# Altium PCB IndAlarmIf1.PcbDoc
Units mil, origin at the board's own origin, x right, y up, seen from the top; angles counter-clockwise.
Board outline 6000 x 4000 mil, 2 copper layers (Top Layer, Bottom Layer); 78 components, 78 nets, 329 pads, 89 vias.
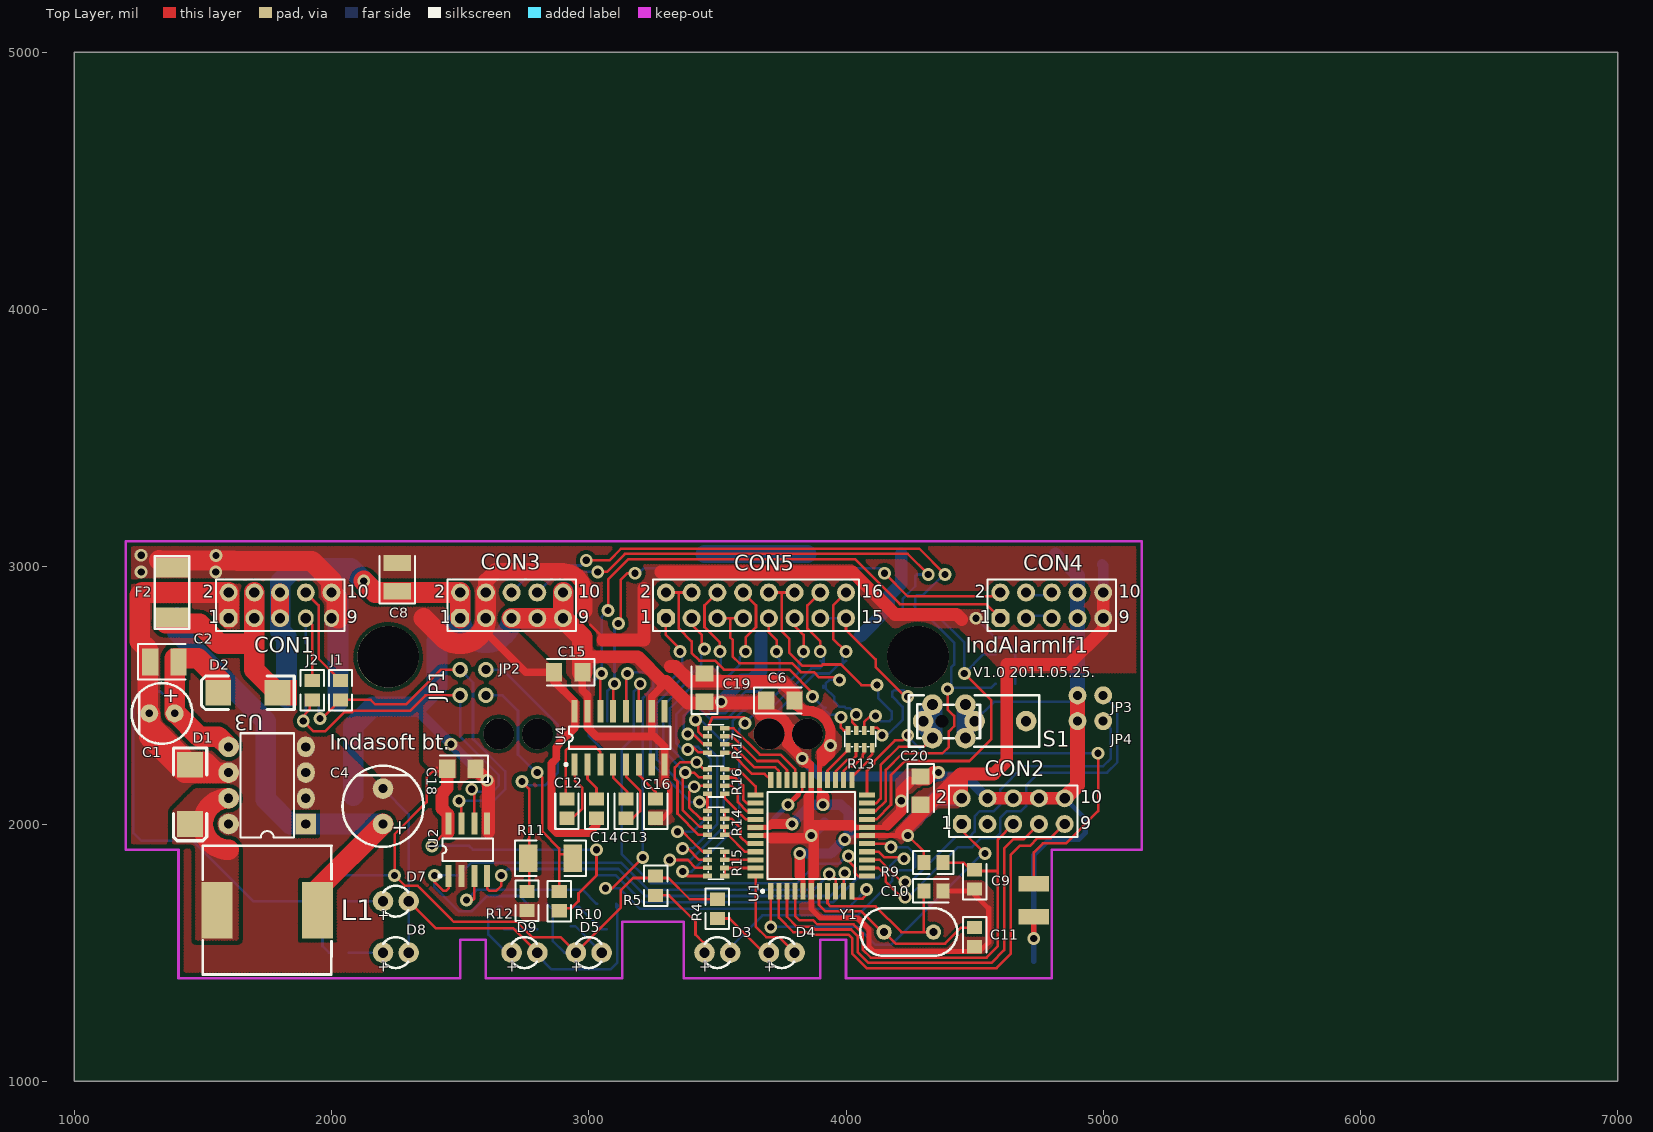
[diagram p0: Top Layer view]
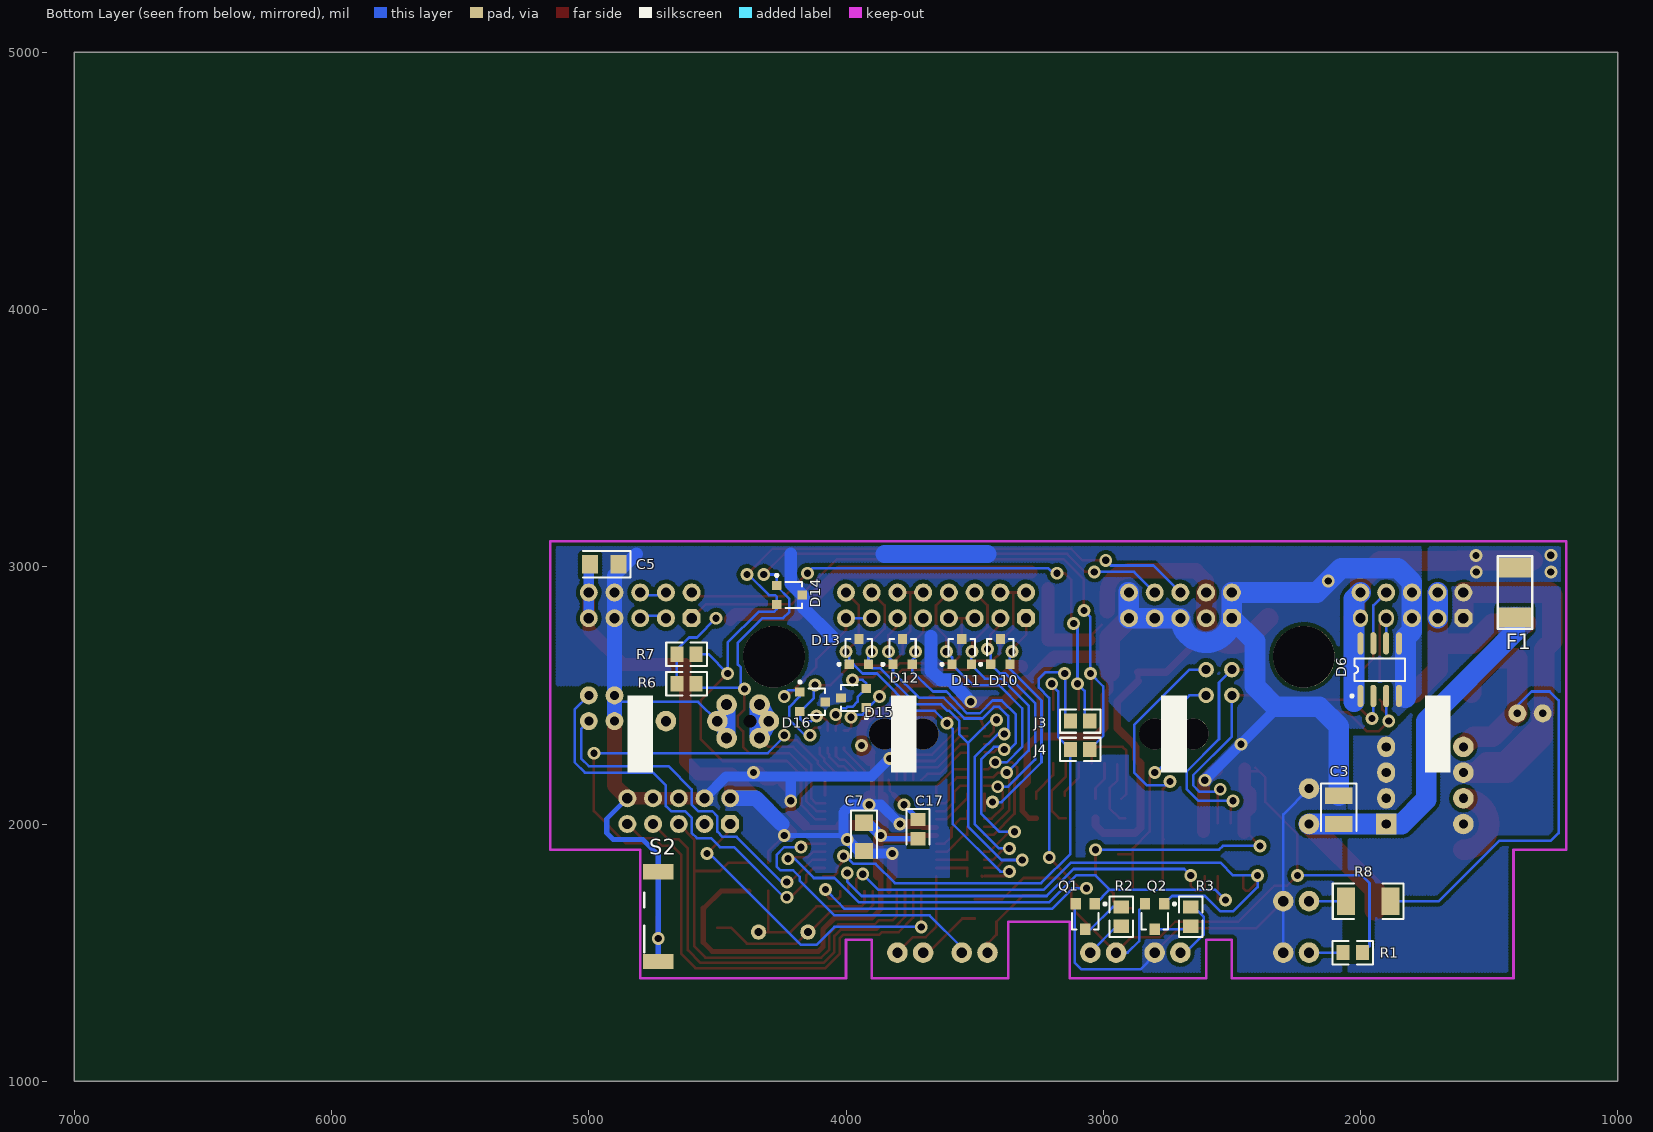
[diagram p1: Bottom Layer view, seen from below]

## Layer stack, top to bottom
Top Layer: signal copper 1.4
Dielectric: dielectric 12.6, FR-4, Dk 4.8
Bottom Layer: signal copper 1.4

## Board outline
1000,1000 7000,1000 7000,5000 1000,5000

## Design rules (kind name [scope] priority, off if disabled: settings)
Clearance poligon [All] p1 off: gap=15
Clearance [All] p2: gap=10
ComponentClearance [All] p1: gap=0 collisioncheckmode=1
PolygonConnect [All] p1: connectstyle=Direct reliefconductorwidth=10 reliefentries=4 polygonreliefangle="90 Angle"
RoutingLayers [All] p1: top layer=Horizontal bottom layer=Vertical
RoutingVias [All] p1: holewidth=28 width=50 viastyle="Through Hole" minholewidth=28 minwidth=50 maxholewidth=28 maxwidth=50
SolderMaskExpansion [All] p1: expansion=4
TestPointUsage [All] p1: valid=0 allowmultiple=FALSE
Testpoint [All] p1: side=15 testpointundercomponent=TRUE minsize=40 maxsize=100 preferedsize=60 minholesize=0 maxholesize=40 preferedholesize=32 testpointgrid=1 style=1023 order=1234567890
Width POWER [InNetClass('Powe Nets')] p1: maxlimit=80 minlimit=10 preferedwidth=20 toplayer_prefwidth=10 bottomlayer_prefwidth=10 minimp=50.000000 maximp=50.000000 favimp=50.000000
Width [All] p2: maxlimit=20 minlimit=10 preferedwidth=10
16 further rules are at their usual default settings.

## Classes and differential pairs
net class "Powe Nets": GND NetC3_2 NetD1_2 U+ UIN VCC

## Components (designator, comment, footprint, x,y, rotation, side; value= is the part's Value field where it differs from the comment)
C1 "Cap Pol1" C6X11RM2.5 1390,2430 r180 top
C2 "Cap Semi" CC3225-1210 1350,2630 r0 top
C3 "Cap Semi" CC3225-1210 2085,2055 r270 bottom
C4 "Cap Pol1" C8X11RM3.5 2200,2000 r90 top
C5 "Cap Semi" CC3216-1206 4940,3010 r0 bottom
C6 "Cap Semi" CC3216-1206 3745,2480 r0 top
C7 "Cap Semi" CC3216-1206 3930,1950 r270 bottom
C8 "Cap Semi" CC3225-1210 2255,2960 r90 top
C9 "Cap Semi" CC2012-0805 4500,1785 r90 top
C10 "Cap Semi" CC2012-0805 4340,1740 r0 top
C11 "Cap Semi" CC2012-0805 4500,1560 r270 top
C12 "Cap Semi" CC2012-0805 2915,2060 r90 top
C13 "Cap Semi" CC2012-0805 3145,2060 r90 top
C14 "Cap Semi" CC2012-0805 3030,2060 r90 top
C15 "Cap Semi" CC3216-1206 2920,2590 r180 top
C16 "Cap Semi" CC2012-0805 3260,2060 r90 top
C17 "Cap Semi" CC2012-0805 3720,1980 r270 bottom
C18 "Cap Semi" CC3216-1206 2505,2215 r180 top
C19 "Cap Semi" CC3216-1206 3450,2530 r90 top
C20 "Cap Semi" CC3216-1206 4290,2130 r270 top
CON1 "RS485" HDR2X5#1 1600,2800 r0 top
CON2 "ISP" HDR2X5#2 4450,2000 r0 top
CON3 "IIC" HDR2X5#2 2500,2800 r0 top
CON4 "RS232" HDR2X5#2 4600,2800 r0 top
CON5 "EXT" HDR2X8 3300,2800 r0 top
D1 "LL5819" MELF 1450,2000 r270 top
D2 "LL5819" MELF 1560,2510 r180 top
D3 "L-13ID" LED3MM 3450,1500 r0 top
D4 "L-13GD" LED3MM 3700,1500 r0 top
D5 "L-13ID" LED3MM 2950,1500 r0 top
D6 "USB6B1" NSO8#1 1925,2600 r180 bottom
D7 "L-13YD" LED3MM 2200,1700 r0 top
D8 "L-13YD" LED3MM 2200,1500 r0 top
D9 "L-13GD" LED3MM 2700,1500 r0 top
D10 "ESDA6V1L" SO-G3/C2.5#1 3400,2670 r180 bottom
D11 "ESDA6V1L" SO-G3/C2.5#1 3550,2670 r180 bottom
D12 "ESDA6V1L" SO-G3/C2.5#1 3780,2670 r180 bottom
D13 "ESDA6V1L" SO-G3/C2.5#1 3950,2670 r180 bottom
D14 "ESDA6V1L" SO-G3/C2.5#1 4220,2890 r270 bottom
D15 "ESDA6V1L" SO-G3/C2.5#1 3970,2490 r90 bottom
D16 "ESDA6V1L" SO-G3/C2.5#1 4130,2475 r270 bottom
F1 "500mA" minifuse 1400,2900 r270 bottom
F2 "500mA" minifuse 1380,2900 r90 top
J1 "" CR2012-0805 2035,2520 r270 top
J2 "" CR2012-0805 1925,2520 r270 top
J3 "Res Semi" CR2012-0805 3090,2400 r0 bottom
J4 "Res Semi" CR2012-0805 3090,2290 r0 bottom
JP1 "Jumper" JP#1 2600,2500 r180 top
JP2 "Jumper" JP#1 2500,2600 r0 top
JP3 "Jumper" JP#2 4900,2500 r0 top
JP4 "Jumper" JP#2 4900,2400 r0 top
L1 "Inductor" NPIS27H 1700,1715 r0 top
Q1 "MMUN2211" SO-G3/C2.5#2 3070,1640 r0 bottom
Q2 "MMUN2111" SO-G3/C2.5#2 2800,1640 r0 bottom
R1 "Res Semi" CR2012-0805 2030,1500 r180 bottom
R2 "Res Semi" CR2012-0805 2930,1640 r270 bottom
R3 "Res Semi" CR2012-0805 2660,1640 r270 bottom
R4 "Res Semi" CR2012-0805 3500,1670 r90 top
R5 "Res Semi" CR2012-0805 3260,1760 r90 top
R6 "Res Semi" CR2012-0805 4620,2545 r0 bottom
R7 "Res Semi" CR2012-0805 4620,2660 r0 bottom
R8 "Res Semi" CR5025-2010 1970,1700 r180 bottom
R9 "Res Semi" CR2012-0805 4340,1850 r0 top
R10 "Res Semi" CR2012-0805 2885,1700 r90 top
R11 "Res Semi" CR5025-2010 2851.53,1867.24 r0 top
R12 "Res Semi" CR2012-0805 2760,1700.75 r90 top
R13 "4x22" YC164 4055,2330 r180 top
R14 "4x270" YC164 3495,2005 r270 top
R15 "4x270" YC164 3495,1845 r270 top
R16 "4x470" YC164 3495,2165 r90 top
R17 "4x470" YC164 3495,2325 r90 top
S1 "SW-PB" SPPB512300+MINICW 4336,2334 r0 top
S2 "SW-PB" SPPB6A0400-R 4730,1640 r180 bottom
U1 "AtMega..4" 44A 3865,1955 r90 top
U2 "MAX1487CSA" NSO8#2 2530,1900 r0 top
U3 "LM2574N-5" 626-05 1750,2150 r90 top
U4 "DS232AR-N" SOIC16N 3120,2335 r0 top
Y1 "XTAL" HC49 4340,1580 r180 top

## Footprints (in the part's own frame and the unit in brackets; to place one, negate y for a bottom-side part, rotate by r counter-clockwise, add the part's x,y. Pads: shape width x height; smd on the part's side, far side on the other; paste and mask are expansions set on the pad)
44A [mm] "QFP; 44 Leads; Body 10 x 10 mm; Pitch 0.8 mm"
  rect 1.6x0.5 smd: 1(-5.5,4) 2(-5.5,3.2) 3(-5.5,2.4) 4(-5.5,1.6) 5(-5.5,0.8) 6(-5.5,0) 7(-5.5,-0.8) 8(-5.5,-1.6) 9(-5.5,-2.4) 10(-5.5,-3.2) 11(-5.5,-4) 23(5.5,-4) 24(5.5,-3.2) 25(5.5,-2.4) 26(5.5,-1.6) 27(5.5,-0.8) 28(5.5,0) 29(5.5,0.8) 30(5.5,1.6) 31(5.5,2.4) 32(5.5,3.2) 33(5.5,4)
  rect 0.5x1.6 smd: 12(-4,-5.5) 13(-3.2,-5.5) 14(-2.4,-5.5) 15(-1.6,-5.5) 16(-0.8,-5.5) 17(0,-5.5) 18(0.8,-5.5) 19(1.6,-5.5) 20(2.4,-5.5) 21(3.2,-5.5) 22(4,-5.5) 34(4,5.5) 35(3.2,5.5) 36(2.4,5.5) 37(1.6,5.5) 38(0.8,5.5) 39(0,5.5) 40(-0.8,5.5) 41(-1.6,5.5) 42(-2.4,5.5) 43(-3.2,5.5) 44(-4,5.5)
  silkscreen extent -5.62,-4.3 4.3,4.92
626-05 [mil] "DIP; 8 Leads; Row Spacing 7.62 mm; Pitch 2.54 mm"
  rect 80x80 hole 35.43: 1(-150,-150)
  oval 80x70 hole 35.43: 2(-50,-150) 3(50,-150) 4(150,-150)
  round 80 hole 35.43: 5(150,150) 6(50,150) 7(-50,150) 8(-150,150)
  silkscreen extent -203,-104 203,104
C6X11RM2.5 [mil]
  round 70 hole 30: 1(0,0) 2(98.42,0)
  silkscreen extent -69,-118 167,118
C8X11RM3.5 [mil]
  round 80 hole 35: 1(0,0) 2(137.8,0)
  silkscreen extent -89,-157 226,157
CC2012-0805 [mm]
  rect 1.3x1.5 smd: 1(-0.95,0) 2(0.95,0)
  silkscreen extent -2,-1.15 1.5,1.15
CC3216-1206 [mm]
  rect 1.6x1.8 smd: 1(-1.4,0) 2(1.4,0)
  silkscreen extent -2.6,-1.3 2.1,1.3
CC3225-1210 [mm]
  rect 1.6x2.7 smd: 1(-1.4,0) 2(1.4,0)
  silkscreen extent -2.6,-1.75 2.1,1.75
CR2012-0805 [mm]
  rect 1.3x1.5 smd: 1(-0.95,0) 2(0.95,0)
  silkscreen extent -2,-1.15 2,1.15
CR5025-2010 [mm]
  rect 1.8x2.7 smd: 1(-2.2,0) 2(2.2,0)
  silkscreen extent -3.5,-1.75 3.5,1.75
HC49 [mil]
  round 60 hole 30: 1(0,0) 2(192.13,0)
  silkscreen extent -93,-93 285,93
HDR2X5#1 [mil] "Connector; Header; 5x2 Position"
  oct 70x70 hole 40: 1(0,0)
  round 70 hole 40: 2(0,100) 3(100,0) 4(100,100) 5(200,0) 6(200,100) 8(300,100) 10(400,100)
  oval 60x70 hole 40: 7(300,0) 9(400,0)
  silkscreen extent -50,-50 450,150
HDR2X5#2 [mil] "Connector; Header; 5x2 Position"
  oct 70x70 hole 40: 1(0,0)
  round 70 hole 40: 2(0,100) 3(100,0) 4(100,100) 5(200,0) 6(200,100) 7(300,0) 8(300,100) 9(400,0) 10(400,100)
  silkscreen extent -50,-50 450,150
HDR2X8 [mil] "Connector; Header; 8x2 Position"
  oct 70x70 hole 40: 1(0,0)
  round 70 hole 40: 2(0,100) 3(100,0) 4(100,100) 5(200,0) 6(200,100) 7(300,0) 8(300,100) 9(400,0) 10(400,100) 11(500,0) 12(500,100) 13(600,0) 14(600,100) 15(700,0) 16(700,100)
  silkscreen extent -50,-50 750,150
JP#1 [mil]
  round 60 hole 35: 1(0,0) 2(100,0)
JP#2 [mil]
  round 70 hole 35: 1(0,0) 2(100,0)
LED3MM [mil]
  round 80 hole 40: 1(0,0) 2(100,0)
  silkscreen extent 1,-60 99,60
MELF [mil]
  rect 100x100 smd: 1(-230,0) 2(0,0)
  silkscreen extent -295,-65 65,65
minifuse [mil]
  rect 77x124 smd: 1(-96.5,0) 2(96.5,0)
  silkscreen extent -141,-67 141,68
NPIS27H [mil] "NPIS27H SMD induktivitás"
  rect 120x220 smd: 1(-145,-50) 2(245,-50)
  silkscreen extent -200,-300 300,200
NSO8#1 [mm] "Small Outline; 8 Leads; Body Width 3.9 mm; Pitch 1.27 mm"
  oval 0.6x2.2 smd: 1(-1.905,-2.6) 2(-0.635,-2.6) 3(0.635,-2.6) 4(1.905,-2.6) 5(1.905,2.6) 6(0.635,2.6) 7(-0.635,2.6) 8(-1.905,2.6)
  silkscreen extent -2.88,-2.72 2.5,1.1
NSO8#2 [mm] "Small Outline; 8 Leads; Body Width 3.9 mm; Pitch 1.27 mm"
  rect 0.6x2.2 smd: 1(-1.905,-2.6) 2(-0.635,-2.6) 3(0.635,-2.6) 4(1.905,-2.6) 5(1.905,2.6) 6(0.635,2.6) 7(-0.635,2.6) 8(-1.905,2.6)
  silkscreen extent -2.88,-2.72 2.5,1.1
SO-G3/C2.5#1 [mm]
  rect 0.9x0.95 smd: 1(-0.95,-1.25) 2(0.95,-1.25) 3(0,1.25)
  silkscreen extent -2.08,-1.37 1.3,1.25
SO-G3/C2.5#2 [mm]
  rect 1.016x1.143 smd: 1(-0.95,-1.25) 2(0.95,-1.25) 3(0,1.25)
  silkscreen extent -2.07,-1.37 1.3,1.25
SOIC16N [mm] "Small Outline; 16 Leads; Body Width 3.9 mm; Pitch 1.27 mm"
  rect 0.6x2.2 smd: 1(-4.445,-2.625) 2(-3.175,-2.625) 3(-1.905,-2.625) 4(-0.635,-2.625) 5(0.635,-2.625) 6(1.905,-2.625) 7(3.175,-2.625) 8(4.445,-2.625) 9(4.445,2.625) 10(3.175,2.625) 11(1.905,2.625) 12(0.635,2.625) 13(-0.635,2.625) 14(-1.905,2.625) 15(-3.175,2.625) 16(-4.445,2.625)
  silkscreen extent -5.42,-2.75 5,1.13
SPPB6A0400-R [mil] "SPPB6A0400 SWITCH A NYÁK ÉLÉN"
  rect 120x60 smd far side: 1(0,0) 2(0,127.95)
  rect 120x60 smd: 3(0,-174.41) 3(0,174.41)
  silkscreen extent -54,-138 -54,92
SPPB512300+MINICW [mil]
  round 0 hole 49.21: 0(37.4,64.96)
  round 80 hole 40: 1(-36,66) 2(164,66) 3(364,66)
  round 80 hole 43.31: 1(0,0) 1(0,129.92) 2(127.95,0) 2(127.95,129.92)
  silkscreen extent -91,-34 415,166
YC164 [mm] "YC164 Chip Resistor array"
  rect 0.45x0.9 smd: 1(-1.2,-0.85) 2(-0.4,-0.85) 3(0.4,-0.85) 4(1.2,-0.85) 5(1.2,0.85) 6(0.406,0.838) 7(-0.4,0.85) 8(-1.2,0.85)
  silkscreen extent -1.52,-0.76 1.52,0.76

## Part data
C1 C4: "Polarized Capacitor (Radial)"
C2 C3 C5 C6 C7 C8 C9 C10 C11 C12 C13 C14 C15 C16 C17 C18 C19 C20: "Capacitor (Semiconductor SIM Model)"
CON1 CON3 CON4: library part "Header 5X2", "Header, 5-Pin, Dual row"
CON2: library part "HEADER 5X2"
CON5: library part "Header 8X2", "Header, 8-Pin, Dual row"
D1 D2: library part "D Schottky", "Schottky Diode"
D3 D4 D5 D7 D8 D9: library part LED3, "Typical BLUE SiC LED"
D10 D11 D12 D13 D14 D15 D16: "DUAL TRANSIL ARRAY / FOR ESD PROTECTION"
F1 F2: library part "Fuse 1", "Fuse"
J1 J2: library part "Res Semi", "Semiconductor Resistor"
J3 J4 R1 R2 R3 R4 R5 R6 R7 R8 R9 R10 R11 R12: "Semiconductor Resistor"
JP1 JP2 JP3 JP4: "Jumper Wire"
Q1: library part NPNR1, "NPN Transistor"
Q2: library part PNPR1, "NPN Transistor"
R13 R14 R15 R16 R17: library part RES4
S1 S2: "Switch"
U1: library part ATMEGA164PA-AU
U2: "Low-Power, Slew-Rate-Limited RS-485/RS-422 Transceiver"
U3: "Easy Switcher 0.5A Step-Down Voltage Regulator"
U4: "Dual RS-232 Transmitter/Receiver"
Y1: "Crystal Oscillator"

## Free pads (board coordinates)
  round 240 hole 240: 1(2220,2650) 1(4280,2650)
  round 120 hole 120: 2(2650,2350) 2(2800,2350) 2(3700,2350) 2(3850,2350)

## Via types
v1: diameter 50, hole 28, Top Layer to Bottom Layer, 89 vias

## Nets (pads, with @x,y where several pads share a name; then routed paths per layer and width w, separated by ;. In a path a pad name is that pad's centre, name@x,y a point inside that pad or via, vN(x,y) a via of type N, cw(c..) or ccw(c..) an arc to the next point about the centre after c; other vN are vias at no path point)
AN0: CON5.1 D10.2 R14.1 R16.8 | length 988
  Top Layer w10: CON5.1 3300,2735 3355,2680 v1(3355,2670) ; v1(3430,2085) 3461.54,2085 ; R14.1 R16.8
  Bottom Layer w10: v1(3355,2670) 3362.6,2662.4 D10.2 3362.6,2602.6 3240,2480 3240,2240 3395,2085 v1(3430,2085)
AN1: CON5.3 D10.1 R14.2 R16.7 | length 1046.7
  Top Layer w10: CON5.3@3400,2775 3440,2735 v1@3440,2670 ; R14.2 3444.25,2020.75 3434.25,2020.75 3390,2065 3390,2105 3390,2125 3414.25,2149.25 3444.25,2149.25 R16.7
  Bottom Layer w10: v1(3410,2145) 3370,2145 3265,2250 3265,2470 3380,2585 3401.61,2585 D10.1 3437.4,2667.4 v1@3440,2670
  other v1: 3450,2680
AN2: CON5.6 D11.2 R14.3 R16.6 | length 1286.1
  Top Layer w10: R14.3 3430.75,1989.25 3365,2055 3365,2190 v1(3375,2200) 3410,2200 3429,2181 R16.6 ; CON5.6 3450,2850 3450,2765 3510,2705 v1(3510,2670)
  Bottom Layer w10: v1(3375,2200) 3290,2285 3290,2460 3395,2565 3460,2565 3512.6,2617.6 D11.2 3512.6,2652.4 v1@3495,2670
AN3: CON5.8 D11.1 R14.4 R16.5 | length 1429.9
  Top Layer w10: R14.4 3427.24,1957.76 3345,2040 3345,2165 3335,2175 3335,2220 3355,2240 v1(3420,2240) 3447.76,2212.24 R16.5 ; CON5.8 3650,2850 3650,2765 3610,2725 v1(3610,2670)
  Bottom Layer w10: v1(3420,2240) 3390,2240 3375,2240 3315,2300 3315,2315 3315,2450 3405,2540 3506.61,2540 D11.1 3587.4,2647.4 v1(3610,2670)
AN4: CON5.9 D12.2 R15.1 R17.8 | length 1645.3
  Top Layer w10: v1(3345,1970) 3365,1970 3402.24,1932.76 3442.76,1892.24 R15.1 ; v1@3375,2300 3405,2300 3425.36,2279.64 R17.8@3459.65,2279.64 ; R15.1@3461.54,1893.46 R15.1 ; CON5.9 3700,2745 3730,2715 v1@3730,2650 ; R15.1 3457.76,1892.24 R15.1
  Bottom Layer w10: v1(3345,1970) 3405,1970 3425,1990 3475,2040 3475,2250 3425,2300 3395,2300 v1@3375,2300 ; v1(3385,2290) 3365,2290 3340,2315 3340,2335 3340,2425 3395,2480 3430,2480 3480,2430 3530,2430 3610,2515 3661.81,2515 3742.6,2590.79 3742.6,2637.4 v1@3730,2650
  other v1: 3730,2670
AN5: CON5.11 D12.1 R15.2 R17.7 | length 1635.2
  Top Layer w10: v1(3365,1905) 3385,1905 3429.25,1860.75 R15.2 ; v1@3385,2360 3395,2360 3445.75,2309.25 R17.7 ; CON5.11@3800,2770 3835,2735 v1@3835,2650
  Bottom Layer w10: v1(3365,1905) 3404.64,1905 3500,2000.36 3500,2025 3500,2260 3400,2360 v1@3385,2360 ; v1(3385,2350) 3370,2365 3370,2420 3385,2435 3405,2455 3425,2455 3470,2410 3540,2410 3575,2445 3620,2490 3715,2490 3817.4,2590.79 3817.4,2632.4 v1@3835,2650
  other v1: 3835,2670
AN6: CON5.14 D13.2 R15.3 R17.6 | length 1859.8
  Top Layer w10: v1(3315,1860) 3385,1860 3415.75,1829.25 R15.3 ; v1@3425,2415 3425,2360 3444,2341 R17.6 ; v1(3900,2670) 3900,2710 3850,2760 3850,2850 CON5.14
  Bottom Layer w10: v1(3315,1860) 3395,1860 3525,1990 3525,2015 3525,2315 ; v1@3425,2415 3525,2315 ; D13.2@3900,2635 D13.2@3912.6,2622.4 ; v1@3912.6,2657.4 D13.2 3896.81,2605 3865,2605 3725,2465 3630,2465 3605,2440 3598.28,2440 3560,2401.72 3560,2395 3560,2350 3525,2315
  other v1: 3415,2405
AN7: CON5.16 D13.1 R15.4 R17.5 | length 1789.1
  Top Layer w10: v1(3365,1815) 3382.24,1797.76 R15.4 ; R15.4@3470,1795 R15.4@3472.76,1797.76 ; R17.5@3472.24,2372.24 R17.5@3462.24,2372.24 ; v1@3605,2415 3480,2415 R17.5@3462.24,2372.24 ; v1(4000,2670) 3950,2720 3950,2850 CON5.16 ; R17.5@3462.24,2372.24 R17.5 R17.5@3462.24,2372.24
  Bottom Layer w10: v1(3365,1815) 3400,1815 3585,2000 3585,2030 3585,2370 3630,2415 3655,2440 3735,2440 3880,2585 3935,2585 3970.79,2620.79 D13.1 v1@3987.4,2657.4 ; D13.1@3987.4,2622.4 D13.1@4000,2635
  other v1: 3606.91,2391.91
EA: CON1.7 D6.6 J2.1 | length 350.6
  Top Layer w10: CON1.7 1925,2775 J2.1
  Bottom Layer w10: D6.6 CON1.7
EB: CON1.8 D6.7 J1.1 | length 616.9
  Top Layer w10: CON1.8 1950,2850 1950,2642.4 J1.1
  Bottom Layer w10: CON1.8 1950,2850 D6.7
GND: C1.2 C2.1 C3.1 C4.2 C5.1 C6.1 C7.1 C8.1 C9.1 C10.2 C11.2 C15.1 C16.1 C17.2 C18.1 C19.1 C20.1 CON1.1 CON1.2 CON1.5 CON1.6 CON2.4 CON2.6 CON2.8 CON2.10 CON3.1 CON3.2 CON3.5 CON3.7 CON3.9 CON3.10 CON4.7 CON4.8 D1.1 D6.4 D6.5 D7.2 D8.2 D9.2 D10.3 D11.3 D12.3 D13.3 D14.3 D15.3 D16.3 JP3.1 JP4.1 pad.2@3700,2350 pad.2@3850,2350 Q1.2 R12.1 S1.2 S2.1 S2.3 U1.6 U1.18 U1.28 U1.39 U2.2 U2.5 U3.2 U3.3 U3.4 U3.6 U3.8 U4.8 U4.10 U4.15 | length 18552.9
  Top Layer w10: D7.2 2405,1595 2705,1595 D9.2 D9.2@2800,1505
  Top Layer w20: C16.1 3287.6,2022.6 3315,2050 3315,2145 3305,2155 ; U1.39 3700,1955 3710,1945 ; 3850,2235 3865,2220 ; 3855,2105 3865,2115 U1.28 3865,2220 ; U1.6 3865,1790 3875,1800 ; 3865,1770 3865,1670 3900,1635 4045,1635 4090,1590 4090,1521.92 4106.92,1505 4520,1505 4555,1540 4555,1672.4 4552.6,1672.4 4485,1740 C10.2 ; 3865,2235 3865,2220 ; 4020,1995 4028.5,1986.5 U1.18 4151.5,1986.5 4160,1995 ; v1(4730,1555) S2.1
  Top Layer w30: C15.1 2975.12,2519.88 2995,2500 U4.15@2995,2405 ; U4.15 2995,2375 3030,2340 3255,2340 3295,2300 3295,2165 3305,2155 ; 3245,2340 3245,2495 3245,2495.06 3302.3,2552.36
  Top Layer w40: C6.1@3666.17,2483.83 3666.17,2422.49 cw(c3700,2350) 3770.59,2312.35 ; 3710,1945 v1@3875,1945 ; 3775,2310 3850,2235 ; 3785,2300 3785,2370 ; v1@3855,1945 3855,2105 ; 3865,1995 4020,1995 ; 3875,1800 v1@3875,1945 ; v1@3875,1970 v1@3875,1945 ; 4160,1995 4215,2050 4215,2130 4250,2165
  Top Layer w50: C4.2 C4.2@2207.8,2137.8 ; C18.1@2560.12,2209.88 C18.1 2560.12,2214.88 2610,2165 U2.5@2610,1970 ; 2975.12,2650 3190,2650 3285,2555 3300,2555 3375,2480 3385,2470 C6.1@3695,2470 ; C20.1@4285,2175 4315,2175 4340,2200 v1(4360,2200) ; CON2.4 CON2.10
  Top Layer w60: CON2.10 4900,2150 JP3.1
  Top Layer w70: CON1.5 CON1.6
  Top Layer w80: D1.1@1439.19,2240.81 1509.19,2240.81 1550,2200 U3.6 1430,2200 1291.58,2338.43 C1.2 ; D1.1 1295,2385 1295,2426.57 C1.2 ; CON1.1 CON1.2 1265,2900 1255,2890 1255,2710 1285,2680 1285,2436.57 C1.2 ; v1(2125,2945) 2170,2900 CON3.2 CON3.1 ; CON3.5 CON3.9 ; CON3.10 CON3.9 ; C15.1 2975.12,2724.88 CON3.9
  Bottom Layer w10: 2110,2450 2105,2450 2105,2438.51 2115,2448.51 ; C4.2 2300,2037.8 D7.2 D8.2 ; D9.2 2800,1490 2855,1435 3085,1435 3110,1460 3110,1686.62 Q1.2 ; Q1.2@3107.4,1677.4 Q1.2 ; Q1.2@3115,1681.61 Q1.2 ; S1.2@4500,2400 4575,2475 JP3.1@4900,2475
  Bottom Layer w20: C17.2 3852.6,1942.6 v1(3865,1955) ; C7.1@3915.12,2005.12 C7.1 ; S2.3@4730,1465.59 4730,1880 4790,1940 4835,1940 4905,1940 4930,1965 4930,2020 CON2.10
  Bottom Layer w40: 2330.87,2455.87 2330.87,2444.13 v1(2465,2310) v1(2605,2170) ; v1(3830,2255) 3900,2185 4465,2185 CON2.4 ; v1(3865,1955) C7.1@3915.12,2005.12 ; v1(4215,2090) 4215,2185
  Bottom Layer w50: v1(3515,2475) 3595,2560 3630,2560 3670,2595 3670,2730 ; 4055,2730 4165,2840 4165,2885 4215,2935 4215,3049.21 ; 4815,3050 4900,2965
  Bottom Layer w60: JP4.1 4900,2965
  Bottom Layer w70: CON3.10 CON3.10@2905,2905 ; 3450,3049.21 3850,3049.21 ; S1.2@4463.95,2334 S1.2@4463.95,2463.92
  Bottom Layer w80: 1825,2490 1825,2725 1800,2750 CON1.6 1800,2940 1855,2995 2075,2995 2170,2900 CON3.2 CON3.1 2410,2710 2410,2535 2330.87,2455.87 2160.12,2455.87 2085,2380.76 C3.1 ; CON3.1@2500.12,2800.01 ccw(c2600,2805) CON3.5@2699.81,2798.76 ; CON3.5 CON3.7 CON3.9 CON3.10
IRD: CON4.2 J3.1 U4.13 | length 2224.6
  Top Layer w10: U4.13@3095,2443.35 3095,2540 v1(3100,2545) ; v1(3115,2780) 3125,2790 3125,2950 3150,2975 v1@3190,2975 ; v1(4150,2975) 4240,2885 4585,2885 CON4.2
  Bottom Layer w10: J3.1@3072.6,2400 3072.6,2517.6 v1(3100,2545) 3100,2765 v1@3115,2785 ; v1@3190,2975 3195,2975 3215,2995 3985,2995 4030,2995 4130,2995 v1(4150,2975)
  other v1: 3180,2975
ITX: CON4.1 J4.1 U4.14 | length 2510
  Top Layer w10: U4.14@3045,2443.35 3045,2580 v1(3050,2585) ; v1(3075,2830) 3075,2950 3155,3030 4000,3030 4035,3030 4210,2855 4545,2855 CON4.1
  Bottom Layer w10: J4.1 3000,2342.6 3000,2535 v1(3050,2585) 3050,2805 3055,2810 v1(3075,2830)
JP3: JP3.2 U1.13 | length 1617.6
  Top Layer w10: U1.13 4125.98,1829.02 4155,1800 4155,1775 4215,1715 v1(4230,1715)
  Bottom Layer w10: v1(4230,1715) 4240,1715 4435,1910 4490,1910 4525,1945 4580,1945 4600,1965 4600,2025 4625,2050 4680,2050 4700,2070 4700,2150 4750,2200 5015,2200 5055,2240 5055,2445 JP3.2
JP4: JP4.2 U1.14 | length 1410.4
  Top Layer w10: U1.14 4131.2,1860.51 4216.72,1775 v1(4230,1775)
  Bottom Layer w10: v1(4230,1775) 4250,1775 4425,1950 4480,1950 4500,1970 4500,2030 4520,2050 4575,2050 4600,2075 4600,2135 4690,2225 5000,2225 5030,2255 5030,2370 JP4.2
L1: D3.2 U1.16 | length 1130.7
  Top Layer w10: U1.16 4161.5,1923.5 v1(4175,1910)
  Bottom Layer w10: D3.2 3550,1520 3675,1645 4045,1645 4180,1780 4180,1795 4205,1820 4255,1820 4270,1835 4270,1880 4240,1910 v1(4175,1910)
L2: D4.2 U1.44 | length 389.6
  Top Layer w10: U1.44 3648.46,1601.54 3690,1560 3740,1560 D4.2
MISO: CON2.9 U1.2 | length 1787.3
  Top Layer w10: U1.2 3739.02,1700.98 3739.02,1635.98 3795,1580 3860,1580 3870,1570 4010,1570 4025,1555 4025,1495 4080,1440 4585,1440 4640,1495 4640,1880 4675,1915 4715,1915 4745,1945 4795,1945 CON2.9
MOSI: CON2.1 U1.1 | length 1299.3
  Top Layer w10: v1(3707.52,1600) U1.1 ; CON2.1 4450,1975 v1(4540,1885)
  Bottom Layer w10: v1(3707.52,1600) 4045,1600 4115,1530 4175,1530 4530,1885 v1(4540,1885)
NetC3_2: C3.2 C4.1 F1.2 L1.2 U3.1 | length 1786.4
  Top Layer w80: L1.2 1945,1745 C4.1
  Bottom Layer w80: F1.2 1400,2745 1745,2400 1745,2095 1840,2000 U3.1 C4.1
NetC10_1: C10.1 U1.8 Y1.1 | length 662.3
  Top Layer w10: U1.8 3927.99,1692.01 3940,1680 4115,1680 4215,1580 Y1.1 ; 4302.6,1582.6 C10.1
NetC11_1: C11.1 U1.7 Y1.2 | length 746.5
  Top Layer w10: U1.7 3895,1685 3920,1660 4060,1660 4140,1580 Y1.2 4192.87,1535 4385,1535 4447.4,1597.4 C11.1
NetC12_1: C12.1 U4.1 | length 259.6
  Top Layer w10: C12.1 2937.6,2022.6 2975,2060 2975,2140 2945,2170 U4.1
NetC12_2: C12.2 U4.3 | length 388.7
  Top Layer w10: C12.2@2930,2097.4 2910,2117.4 2910,2285 2925,2300 3025,2300 3045,2280 U4.3@3045,2236.65
NetC13_1: C13.1 U4.5 | length 275.8
  Top Layer w10: C13.1 3172.6,2022.6 3200,2050 3200,2130 3145,2185 3145,2190 U4.5@3145,2236.65
NetC13_2: C13.2 U4.4 | length 149.4
  Top Layer w10: U4.4@3095,2236.65 3095,2180 3150,2125 C13.2@3150,2110
NetC14_2: C14.2 U4.2 | length 190.4
  Top Layer w10: U4.2@2995,2195 U4.2@2995,2236.65 ; U4.2 2995,2175 3030,2140 C14.2
NetC16_2: C16.2 U4.6 | length 197.8
  Top Layer w10: U4.6@3195,2200 U4.6@3195,2236.65 ; U4.6 3195,2190 3260,2125 C16.2
NetC17_1: C17.1 U1.29 | length 201.1
  Top Layer w10: 3815,2115 3830,2130 3830,2155 3833.5,2158.5 U1.29
  Top Layer w20: v1(3775,2075) 3815,2115
  Bottom Layer w10: C17.1 C17.1@3720,2020
  Bottom Layer w20: C17.1@3720,2020 v1(3775,2075)
NetCON4_3: CON4.3 CON4.5 | length 100
  Bottom Layer w10: CON4.3@4700,2810 CON4.5@4800,2810
NetCON4_4: CON4.4 CON4.6 | length 100
  Bottom Layer w10: CON4.4@4700,2890 CON4.6@4800,2890
NetD1_2: D1.2 L1.1 U3.7 | length 314.2
  Top Layer w80: 1600,1900 cw(c1600,2000) U3.7
NetD3_1: D3.1 R5.1 | length 344.9
  Top Layer w10: R5.1@3250,1722.6 3312.4,1722.6 3415,1620 3415,1570 3445,1540 3450,1540 D3.1
NetD4_1: D4.1 R4.1 | length 279.9
  Top Layer w10: R4.1 3547.4,1632.6 3680,1500 D4.1 D4.1@3675,1500
NetD5_2: D5.2 R2.2 | length 162.5
  Bottom Layer w10: R2.2 2947.4,1602.6 D5.2
NetD7_1: D7.1 R8.1 | length 143.4
  Bottom Layer w10: R8.1 D7.1
NetD8_1: D8.1 R1.1 | length 132.6
  Bottom Layer w10: R1.1 D8.1
NetD9_1: D9.1 R3.1 | length 254.5
  Bottom Layer w10: R3.1 2647.4,1677.4 2610,1640 2610,1570 2680,1500 D9.1
NetJP1_1: JP1.1 R10.2 R11.2 | length 966.2
  Top Layer w10: v1(2800,2200) 2820,2180 2820,1970 2885,1905 R10.2@2885,1747.4 ; 2887.02,1882.02 R11.2@2941.61,1882.02
  Bottom Layer w10: JP1.1 2665,2500 2725,2440 2725,2270 2795,2200 v1(2800,2200)
NetJP2_2: JP2.2 R11.1 R12.2 | length 1144.1
  Top Layer w10: v1(2740,2165) 2768.39,2136.61 R12.2@2768.39,1753.61
  Bottom Layer w10: JP2.2 2665,2600 2880,2385 2880,2200 2830,2150 2755,2150 v1(2740,2165)
NetQ1_3: Q1.3 R2.1 | length 175.9
  Bottom Layer w10: R2.1 2962.6,1677.4 3049.21,1590.79 Q1.3
NetQ2_3: Q2.3 R3.2 | length 128.2
  Bottom Layer w10: R3.2@2671.81,1590.79 Q2.3
NetR13_5: R13.5 U1.26 | length 158
  Top Layer w10: U1.26 3927.99,2207.99 4007.76,2287.76 R13.5
NetR13_6: R13.6 U1.25 | length 170.1
  Top Layer w10: U1.25 3959.49,2204.49 4005,2250 4025,2250 4039,2264 R13.6
NetR13_7: R13.7 U1.24 | length 169.8
  Top Layer w10: U1.24 3990.98,2205.98 4010,2225 4030,2225 4065,2260 4065,2270 4070.75,2275.75 R13.7
NetR13_8: R13.8 U1.23 | length 184
  Top Layer w10: U1.23@4022.48,2197.48 U1.23 4022.48,2182.84 4085,2245.36 4085,2255.36 4102.24,2272.6 R13.8
NetR14_5: R14.5 R14.6 U1.41 | length 178.7
  Top Layer w10: R14.6 3528,1958.22 R14.5 3542.24,1957.76 3607.99,1892.01 U1.41
NetR14_7: R14.7 R14.8 U1.40 | length 212.3
  Top Layer w10: R14.8 R14.7 3554.25,2020.75 3590,1985 3590,1950 3616.5,1923.5 U1.40
NetR15_5: R15.5 R15.6 U1.43 | length 151.9
  Top Layer w10: R15.5 3528.47,1828.57 R15.6 U1.43
NetR15_7: R15.7 R15.8 U1.42 | length 151.6
  Top Layer w10: R15.8 R15.7 3528.7,1860.51 U1.42
NetR16_1: R16.1 U1.37 | length 170.8
  Top Layer w10: R16.1 3528.46,2101.54 3612.01,2017.99 U1.37
NetR16_2: R16.2 U1.36 | length 184.8
  Top Layer w10: R16.2 3555.75,2149.25 3580,2125 3580,2085 3615.51,2049.49 U1.36
NetR16_3: R16.3 U1.35 | length 193.5
  Top Layer w10: R16.3 3569.25,2180.75 3600,2150 3600,2095 3614.02,2080.98 U1.35
NetR16_4: R16.4 U1.34 | length 181.3
  Top Layer w10: R16.4 3582.76,2212.24 3648.46,2146.54 U1.34
NetR17_1: R17.1 U1.33 | length 223.1
  Top Layer w10: R17.1 3547.24,2277.76 3552.24,2277.76 3635,2195 3684.05,2195 U1.33
NetR17_2: R17.2 U1.32 | length 287.8
  Top Layer w10: R17.2 3555.75,2309.25 3645,2220 3725,2220 3739.02,2205.98 U1.32
NetR17_3: R17.3 U1.31 | length 334.4
  Top Layer w10: R17.3 3559.25,2340.75 3655,2245 3735,2245 3770.51,2209.49 U1.31
NetR17_4: R17.4 U1.30 | length 381
  Top Layer w10: R17.4 3562.76,2372.24 3665,2270 3745,2270 3802.01,2212.99 U1.30
O01: CON5.2 CON5.4 D15.1 R13.4 | length 1130
  Top Layer w10: CON5.2 CON5.4 ; 3350,2900 3350,2760 3400,2710 3400,2665 3430,2635 3490,2635 3525,2600 3780,2600 3870,2510 v1(3870,2495) ; v1(3980,2415) 3980,2375 3991.53,2363.47 R13.4
  Bottom Layer w10: v1(3870,2495) 3912.4,2452.6 D15.1 ; D15.1@3910.79,2449.21 3935,2425 v1@3985,2425
O23: CON5.5 CON5.7 D15.2 R13.3 | length 1061.3
  Top Layer w10: CON5.5 CON5.7 ; 3550,2800 3550,2725 3560,2715 3560,2650 3585,2625 3790,2625 3825,2590 3875,2590 3895,2570 v1@3955,2570 ; v1@4029.25,2409.25 v1@4055,2435 ; R13.3 4039.25,2380.75 4025,2395 4025,2410 v1(4040,2425)
  Bottom Layer w10: D15.2@3910.79,2529.21 D15.2@3910.79,2537.4 ; v1(3975,2560) 3935,2560 3920.79,2545.79 D15.2 3954.49,2493.7 3954.49,2475.51 3975,2455 3994.36,2455 3999.36,2450 4015,2450 v1(4040,2425) ; v1@4045,2435 v1@4055,2435
O45: CON5.10 CON5.12 D16.2 R13.2 | length 1099.6
  Top Layer w10: CON5.10 CON5.12 ; 3750,2900 3750,2750 3780,2720 3780,2665 3830,2615 3905,2615 3910,2620 3980,2620 4060,2540 v1(4120,2540) ; R13.2 4070.75,2395.75 4095,2420 v1(4115,2420) v1@4100,2420
  Bottom Layer w10: v1@4125,2555 4125,2490 4177.4,2437.6 4177.4,2407.4 4170,2400 4135,2400 v1(4115,2420) v1@4126.61,2420
O67: CON5.13 CON5.15 D16.1 R13.1 | length 877.2
  Top Layer w10: CON5.15 4000,2755 4115,2640 4115,2610 4230,2495 v1(4240,2495) ; R13.1@4100,2375 4120,2375 4140,2355 v1(4140,2345)
  Bottom Layer w10: CON5.13 CON5.15 ; v1(4140,2345) 4160,2345 4220,2405 4220,2455 4180,2495 4180,2513.19 4186.81,2520 4225,2520 4240,2505 v1(4240,2495)
OE: Q1.1 U1.15 U2.3 | length 2208.3
  Top Layer w10: v1(2525,1705) 2550,1705 2555,1710 U2.3 ; U1.15 4112.99,1892.01 4127.99,1892.01 4150,1870 4220,1870 v1(4225,1865)
  Bottom Layer w10: v1(2525,1705) 2565,1745 2975,1745 ; Q1.1 3030.79,1689.21 2975,1745 ; v1(4225,1865) 4200,1865 4125,1790 4045,1790 3950,1695 3210,1695 3105,1800 3030,1800 2975,1745
R\E\S\E\T\: C9.2 CON2.5 R9.2 U1.4 | length 1731.3
  Top Layer w10: U1.4 3802.01,1642.99 3820,1625 3873.28,1625 3888.28,1610 4030,1610 4065,1575 4065,1511.57 4096.57,1480 4546.72,1480 4546.72,1481.72 4590,1525 4590,1940 CON2.5 ; R9.2 4457.4,1850 4490,1817.4 4587.6,1817.4
RXD: Q2.1 U1.9 U2.1 | length 2336.6
  Top Layer w10: v1(2400,1800) 2400,1775 2435,1740 2445,1740 2455,1750 U2.1 ; v1@3935,1810 3959.49,1785.51 U1.9
  Bottom Layer w10: Q2.1 2731.81,1720 2605,1720 2545,1660 2495,1660 2400,1755 v1(2400,1800) 2495,1800 2545,1850 3125.71,1850 3230.71,1745 3875,1745 v1(3935,1805)
RXD2: J3.2 U1.11 U4.12 | length 2528.4
  Top Layer w10: v1(3065,1750) 3090,1750 v1(3210,1870) ; U4.12@3145,2443.35 v1@3145,2580 ; U1.11 4022.48,1717.52 4030,1710 4065,1710 4080,1725 v1(4080,1745)
  Bottom Layer w10: v1(3065,1750) 3120,1750 3200,1670 4005,1670 4025,1690 v1(4080,1745) ; J3.2@3147.4,2400 3147.4,2582.4 v1(3150,2585) 3155,2590 3225,2590 3250,2565 3250,2530 3210,2490 v1(3210,1870)
S1: S1.0 S1.1 U1.21 | length 981.6
  Top Layer w10: U1.21 4117.7,2080.98 4135,2098.28 4135,2230 4205,2300 4302,2300 S1.1@4336,2334
  Bottom Layer w10: S1.1@4335,2335 S1.1@4336,2334
  Bottom Layer w20: S1.1@4280,2385 S1.1@4320,2315 ; S1.1@4280,2415 S1.1@4316,2478.92 ; S1.1@4336,2334 S1.1@4336,2463.92 ; S1.1@4350,2334 S1.1@4350,2463.92 ; S1.1@4365,2339 S1.1@4365,2468.92
S2: S2.2 U1.22 | length 1751
  Top Layer w10: U1.22 4081.54,2206.54 4110,2235 4110,2245 4190,2325 4220,2325 v1(4240,2345) ; S2.2 4730,1890 4765,1925 4855,1925 4980,2050 v1(4980,2275)
  Bottom Layer w10: v1(4240,2345) 4240,2340 4305,2275 v1(4980,2275)
SCK: CON2.7 U1.3 | length 1644
  Top Layer w10: U1.3 3770.51,1704.49 3770.51,1697.77 3770.51,1639.49 3810,1600 3870,1600 3880,1590 4020,1590 4045,1565 4045,1503.28 4088.28,1460 4565,1460 4615,1510 4615,1905 4650,1940 4690,1940 CON2.7
SCL: CON3.6 D14.2 R7.1 U1.19 | length 3539.4
  Top Layer w10: v1(2990,3025) 3080,3025 3125,3070 4095,3070 4285,3070 v1(4385,2970) ; U1.19 4117.99,2017.99 4175,2075 4175,2190 4230,2245 4480,2245 4565,2330 4565,2480 v1(4460,2585)
  Bottom Layer w10: CON3.6 2805,3005 2970,3005 v1(2990,3025) ; D14.2@4265,2848.39 D14.2 ; D14.2@4269.21,2850.79 D14.2 ; D14.2@4269.21,2854.21 D14.2 ; v1@4385,2955 v1(4385,2970) ; v1@4400,2955 v1(4385,2970) ; R7.1 4535,2660 v1(4460,2585) 4460,2700 4460,2705 4340,2825 4280,2825 4269.21,2835.79 4269.21,2884.21 4275,2890 4300,2890 4380,2970 v1(4385,2970)
SDA: CON3.8 D14.1 R6.1 U1.20 | length 3219
  Top Layer w10: v1(3035,2980) 3070,2980 3140,3050 4080,3050 4240,3050 v1(4320,2970) ; U1.20 4115,2050 4155,2090 4155,2210 4220,2275 4375,2275 4400,2300 4400,2360 4420,2380 4420,2420 4395,2445 v1(4395,2525) v1@4391.55,2521.55
  Bottom Layer w10: CON3.8 2880,2980 v1(3035,2980) ; v1(4320,2970) 4275,2970 4270,2965 4270,2928.19 D14.1 4269.21,2924.21 4220,2875 4220,2825 4245,2800 4325,2800 4420,2705 4420,2620 4408.45,2608.45 4408.45,2538.45 v1(4395,2525) ; v1@4405,2535 v1(4395,2525) ; R6.1 4580,2545 4565,2530 4400,2530 v1(4395,2525)
TXD: U1.10 U2.4 | length 1690.9
  Top Layer w10: U2.4 2605,1750 2615,1740 2640,1740 2660,1760 v1(2660,1800) ; U1.10 3990.98,1800.98 v1@4010,1820
  Bottom Layer w10: v1(2660,1800) 2685,1825 3115.36,1825 3220.36,1720 3939.64,1720 3995,1775.36 v1(3995,1810)
TXD2: J4.2 U1.12 U4.11 | length 1911.3
  Top Layer w10: U4.11@3195,2443.35 v1@3195,2540 ; v1@4005,1860 4035,1830 4035,1810 4047.48,1797.52 U1.12 U1.12@4087.48,1797.52 ; v1@4010,1855 v1(4010,1875)
  Bottom Layer w10: v1(3200,2545) 3200,2540 3175,2515 3175,2337.6 J4.2 3127.4,1883.66 3241.07,1770 3810,1770 3885,1845 3970,1845 v1@4000,1875 ; v1@4000,1875 v1(4010,1875) v1@4000,1875
U+: C1.1 C2.2 D2.2 R8.2 U3.5 | length 2246.6
  Top Layer w80: D2.2@1570,2510 1570,2555 1480,2645 1390,2645 C1.1 1395,2430 1485,2340 1560,2340 U3.5
  Bottom Layer w10: C1.1 1390,2460 1335,2515 1265,2515 1230,2480 1230,1965 1260,1935 1460,1935 1695,1700 R8.2
UIN: CON1.3 CON1.4 D2.1 F2.1 | length 904.6
  Top Layer w80: F2.1@1355,2780 1487.05,2777.95 1565,2700 1700,2700 ; CON1.4 1700,2600 D2.1
  Bottom Layer w80: CON1.3 CON1.4
VCC: C5.2 C6.2 C7.2 C8.2 C14.1 C15.2 C18.2 C19.2 C20.2 CON1.9 CON1.10 CON2.2 CON3.3 CON3.4 CON4.9 CON4.10 D5.1 D6.1 D6.8 F1.1 F2.2 Q2.2 R1.2 R4.2 R5.2 R6.2 R7.2 R9.1 R10.1 U1.5 U1.17 U1.27 U1.38 U2.8 U4.16 | length 14799
  Top Layer w10: v1(2390,1915) U2.8@2445,1970 ; 2395,2205 C18.2@2455,2205 ; 2408.68,2218.62 2370,2179.94 2370,2085.15 2245,1960.15 v1(2245,1800) 2285,1760 2335,1760 2345,1750 2465,1630 2475,1620 2720,1620 2780,1560 2890,1560 D5.1 3125,1675 3125,1725 3125,1742.57 3172.43,1790 3310,1790 3392.6,1707.4 R4.2 ; R10.1@2885,1672.6 2932.6,1672.6 2960,1700 2960,1730 3030,1800 v1(3030,1900) ; 3005,2775 3055,2725 ; v1(4240,1955) 4302.6,1892.4 R9.1
  Top Layer w20: C15.2@2864.88,2555.12 C15.2 ; U1.38 3701.5,1986.5 3715,2000 ; 3820,1800 3833.5,1786.5 U1.5 ; 3896.5,2280 3896.5,2226.5 ; 3910,2105 3896.5,2118.5 U1.27 3896.5,2226.5 ; 3910,2245 3905,2235 3896.5,2226.5 ; 4040,1955 U1.17 v1(4240,1955) 4215,1965
  Top Layer w30: CON3.3 2600,2745 2755,2590 C15.2 ; C15.2@2864.88,2555.12 2945,2475 2945,2443.35 2945,2385 2945,2373.09 2879.24,2307.32 2879.24,2303.74 2873.35,2297.84 2873.35,2253.35 2855,2235 2855,1985 2875,1965 3000,1965 3030,1995 C14.1
  Top Layer w40: 3715,2000 v1(3790,2000) ; C6.2@3795,2470 3839.48,2439.38 cw(c3850,2350) 3904.87,2278.66 ; 3820,1800 v1(3820,1885) ; 3910,2245 3940,2275 3940,2360
  Top Layer w50: C18.2 2449.88,2139.88 2430,2120 2430,2060 2453.19,2036.81 U2.8@2453.19,1966.81 ; 3055,2715 3215,2715 3215,2915 ; 3280,2980 3321.57,2980 4025,2980 4190,2815 4430,2815 4450,2795 ; 3316.6,2612.66 3317.34,2612.66 3337.34,2612.66 ; 3345,2605 3337.34,2612.66 ; C6.2 3800.12,2504.88 3750,2555 3730,2555 3395,2555 3337.34,2612.66 ; v1(3910,2075) 3910,2105 ; 4215,1965 4350,2100 ; 4395,2145 4445,2195 4575,2195 4625,2245 4625,2620 4865,2620 5000,2755 CON4.10 ; 4415,2140 4450,2105 CON2.2 ; 4350,2100 4420,2170 4450,2170 CON2.2 ; 4350,2100 CON2.2
  Top Layer w60: 2355,2800 2358.69,2800 ; CON3.4 2600,2945 2638.82,2983.82 2900,2983.82 cw(c2900,2900) 2983.82,2900 2983.82,2829.32
  Top Layer w80: F2.2@1330,3025 1922.95,3022.05 2000,2945 CON1.10 2020,2880 2020,2805 CON1.9@2025,2800 ; 2358.69,2800 2432.17,2726.52 ccw(c2500,2800) CON3.3 CON3.4
  Bottom Layer w10: R1.2 1990,1500 1965,1525 1965,1770 1995,1800 v1(2245,1800) ; v1(2390,1915) 2535,1915 2550,1900 v1(3030,1900) ; Q2.2@2849.21,1677.4 Q2.2 2860,1666.61 2860,1545 2905,1500 D5.1 ; v1(3995,1940) v1@4010,1955 ; v1(4505,2800) 4580,2725 4610,2725 4655,2680 4655,2662.4 R7.2 R6.2
  Bottom Layer w20: v1@3810,1895 v1(3820,1885) ; v1(3995,1940) 4010,1955 v1(4240,1955)
  Bottom Layer w40: v1(3790,2000) 3865,2075 v1(3910,2075) 3980,2075 4010,2045 v1@4010,1955 ; v1(3820,1885) 3940,1885 v1(3995,1940) ; C5.2 5000,3005.12 CON4.9
  Bottom Layer w60: 4250,2000 4350,2100 CON2.2
  Bottom Layer w80: CON1.10 2025,2875 2025,2475
  other v1: 3940,2305 1260,2980 1550,2980 1550.48,3043.89 1260,3045
XA: D6.3 J2.2 JP1.2 U2.6 | length 1579.5
  Top Layer w10: J2.2 1915,2472.6 1915,2445 1890,2420 v1(1890,2400) 1930,2360 1975,2360 2050,2435 2080,2435 2085,2440 2305,2440 2365,2500 JP1.2 ; v1(2545,2135) 2555,2125 U2.6
  Bottom Layer w10: v1(1890,2400) 1900,2410 D6.3 D6.3@1900,2470 ; JP1.2 2500,2360 2500,2340 2650,2190 2650,2150 2625,2125 2555,2125 v1(2545,2135)
XB: D6.2 J1.2 JP2.1 U2.7 | length 1590.1
  Top Layer w10: v1@1955,2400 1955,2402.6 J1.2 2152.4,2482.6 2170,2465 2290,2465 2425,2600 JP2.1 ; U2.7 v1@2505,2080
  Bottom Layer w10: D6.2@1950,2465 D6.2 1950,2405 v1@1955,2400 ; v1(2495,2090) 2630,2090 2675,2135 2675,2205 2550,2330 2550,2360.36 2550,2550 JP2.1
  other v1: 1955,2410
pads on no net: CON2.3 S1.3 U4.7 U4.9

## Polygon pours and split planes (outlines as drawn)
GND on Top Layer (hatched 45Degree grid 8 track 10, remove dead copper): 2200,2137.8 2200,2180 2002.33,2377.67 2059.65,2435 2878.38,2435 2878.38,1625 2465,1625 2330,1760 2230,1760 2230,1955 2215,1970 2190,1995
VCC on Top Layer (hatched 45Degree grid 8 track 10, remove dead copper): 2480,2180 2480,2320 2515,2355 2887.4,2355 2887.4,2613.57 2360,2613.57 2360,2245 2425,2180
VCC on Top Layer (hatched 45Degree grid 8 track 10, remove dead copper): 3865,2040 3865,2300.6 3665.6,2500 3145,2500 3145,2802.97 3330,2802.97 3532.97,2600 3825,2600 4000,2425 4000,2040
GND on Top Layer (hatched 45Degree grid 8 track 10, remove dead copper): 2985,2680 3195,2680 3365,2510 3735,2510 3820,2425 3860,2385 3885,2360 3885,2095 3600,2095 3600,2340.75 3525.75,2415 3210,2415 3100,2525 2975.12,2525
GND on Top Layer (hatched 45Degree grid 8 track 10, remove dead copper): 3010,2345 3235,2120 3235,2000 3430,2000 3430,2468.42 2995,2468.42
VCC on Top Layer (hatched 45Degree grid 8 track 10, remove dead copper): 2606.97,2651.97 2875,2383.95 2868.95,2390 2863.95,2395 2863.95,2250 2895,2250 2895,2315 2985,2405 2985,2755.33 2631.86,2755.33
GND on Top Layer (hatched 45Degree grid 8 track 10, remove dead copper): 2700,2800 2935,2565 2935,2535 2985,2485 2985,2395 3055,2395 3055,2778.58 3027.58,2806
VCC on Top Layer (hatched 45Degree grid 8 track 10, remove dead copper): 1210,3090 1210,2940 1860,2940 1860,2420 2375,2420 2695,2740 2915,2740 2960,2695 3208.58,2695 3268.58,2755 3268.58,2925 4025,2925 4185,2765 4440,2765 4615,2590 5140,2590 5140,3090
VCC on Top Layer (hatched 90Degree grid 5 track 10, remove dead copper): 3960,1970 4185,1970 4260,2045 4260,2100 4290,2130 4355,2195 4440,2195 4440,2065 4355,2065 4230,1940 4210,1920 3955,1920
GND on Top Layer (hatched 90Degree grid 5 track 10, remove dead copper): 3680,2140 4050,2140 4050,1770 3680,1770
VCC on Top Layer (hatched 90Degree grid 5 track 10, remove dead copper): 3794,2039.8 3620,2039.8 3620,1965 3795,1965
GND on Top Layer (hatched 90Degree grid 5 track 10, remove dead copper): 4325,2185 4235,2095 4235,2045 4165,1975 4000,1975 4000,2025 4127.08,2025 4175,2072.92 4175,2150 4235,2210 4270,2210
GND on Top Layer (hatched 45Degree grid 8 track 10, remove dead copper): 4580,1795 4350,1795 4315,1760 4302.6,1747.6 4302.6,1535 4192.87,1535 3920,1807.87 3775,1807.87 3775,1410 4590,1410
NetD1_2 on Top Layer (hatched 45Degree grid 8 track 10, remove dead copper): 1635,1900 1635,1550 1460,1550 1460,1910 1385,1910 1385,2050 1470,2135 1600,2135 1515,2050 1515,1950
GND on Top Layer (hatched 45Degree grid 8 track 10, remove dead copper): 1210,2935 1730,2935 1730,2605 2197.2,2137.8 2197.2,1410 1205,1410
GND on Bottom Layer (hatched 45Degree grid 8 track 10): 2839.74,2126.97 2890,2177.24 2890,2265 3127.4,2265 3127.4,1850 2825,1850
GND on Bottom Layer (hatched 45Degree grid 8 track 10, remove dead copper): 1765,3075 1765,2510 1900,2375 2060,2375 2060,1980 2075,1980 2075,1415 2845,1415 2845,2345 3020,2520 3375,2520 3465,2430 3555,2430 3625,2360 4135,2360 4315,2540 5140,2540 5140,3090
VCC on Bottom Layer (hatched 45Degree grid 8 track 10, remove dead copper): 1210,3090 1210,2945 1735,2945 1735,3090
NetC3_2 on Bottom Layer (hatched 45Degree grid 8 track 10, remove dead copper): 1340,2840 1340,2755 1375,2720 1475,2720 1460,2735 1460,2840
GND on Bottom Layer (hatched 45Degree grid 8 track 10, remove dead copper): 1220,2920 1735,2920 1735,2435 1795,2435 1890,2340 2025,2340 2025,2140 2045,2140 2045,1410 1205,1410
GND on Bottom Layer (hatched 90Degree grid 5 track 10, remove dead copper): 3606.91,2391.91 3606.91,2210 3646.91,2170 4120,2170 4235,2055 4310,2130 4420,2130 4500,2050 4605,2050 4605,2275 4305,2275 4205,2375 4195,2385 4190,2390
VCC on Bottom Layer (hatched 90Degree grid 5 track 10, remove dead copper): 4500,2175 4500,1735 3600,1735 3600,2205

## Keep-outs
Keep-Out Layer:
  lines w10: 1200,1900 1405,1900 1405,1400 2500,1400 2500,1550 2600,1550 2600,1400 3130,1400 3130,1620 3370,1620 3370,1400 3900,1400 3900,1550 4000,1550 4000,1400 4800,1400 4800,1900 5150,1900 5150,2600 5150,3100 1200,3100 1200,1900

## Other copper
Top Layer:
  rectangle net UIN: 1825,2460 1865,2560

## Silkscreen, mask and mechanical layers (free items; w line width, h text height)
Top Overlay:
  text "IndAlarmIf1" at 4465,2665 h60
  text "V1.0 2011.05.25." at 4495,2570 h40
  text "Indasoft bt." at 1993.81,2287.96 h60
Bottom Overlay:
  rectangle: 3725,2200 3825,2500
  rectangle: 2675,2200 2775,2500
  rectangle: 1650,2200 1750,2500
  rectangle: 4750,2200 4850,2500

## Text inside footprints (layer, text, board x,y; h text height)
C1: Top Overlay "+" at 1410,2521 h60 r180
C4: Top Overlay "+" at 2290,1950 h60 r90
CON1: Top Overlay "10" at 2060,2880 h50; Top Overlay "9" at 2060,2780 h50; Top Overlay "1" at 1520,2780 h50; Top Overlay "2" at 1500,2880 h50
CON2: Top Overlay "2" at 4350,2080 h50; Top Overlay "1" at 4370,1980 h50; Top Overlay "9" at 4910,1980 h50; Top Overlay "10" at 4910,2080 h50
CON3: Top Overlay "2" at 2400,2880 h50; Top Overlay "1" at 2420,2780 h50; Top Overlay "9" at 2960,2780 h50; Top Overlay "10" at 2960,2880 h50
CON4: Top Overlay "2" at 4500,2880 h50; Top Overlay "1" at 4520,2780 h50; Top Overlay "9" at 5060,2780 h50; Top Overlay "10" at 5060,2880 h50
CON5: Top Overlay "2" at 3200,2880 h50; Top Overlay "1" at 3200,2780 h50; Top Overlay "15" at 4060,2780 h50; Top Overlay "16" at 4060,2880 h50
D3: Top Overlay "+" at 3430,1425 h40
D4: Top Overlay "+" at 3680,1425 h40
D5: Top Overlay "+" at 2930,1425 h40
D7: Top Overlay "+" at 2180,1625 h40
D8: Top Overlay "+" at 2180,1425 h40
D9: Top Overlay "+" at 2680,1425 h40